# EAGLE board aaduino-v4 (EAGLE 7.6.0)
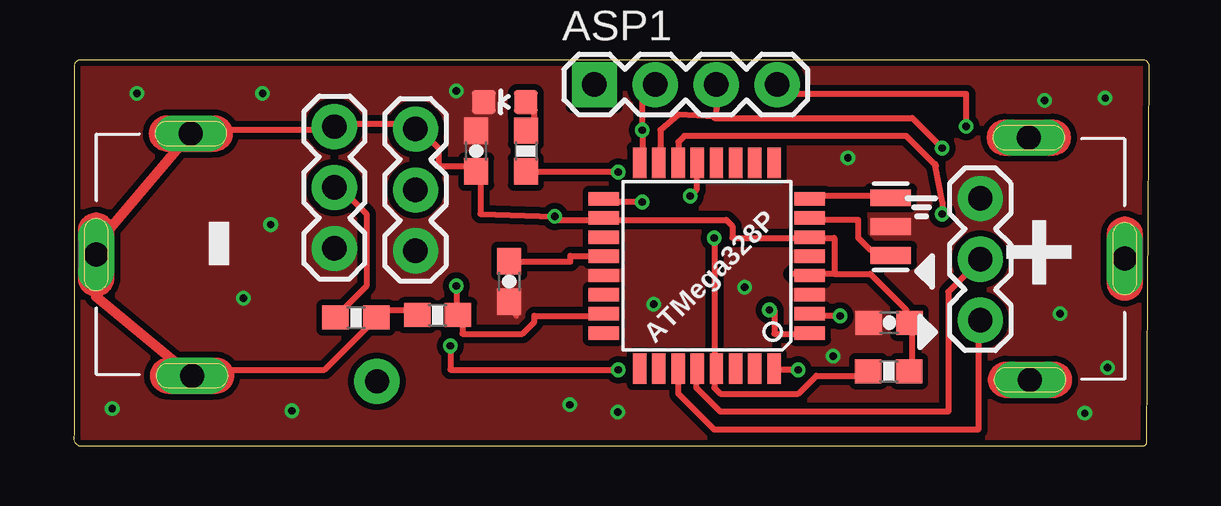
[diagram p0: board, top side]
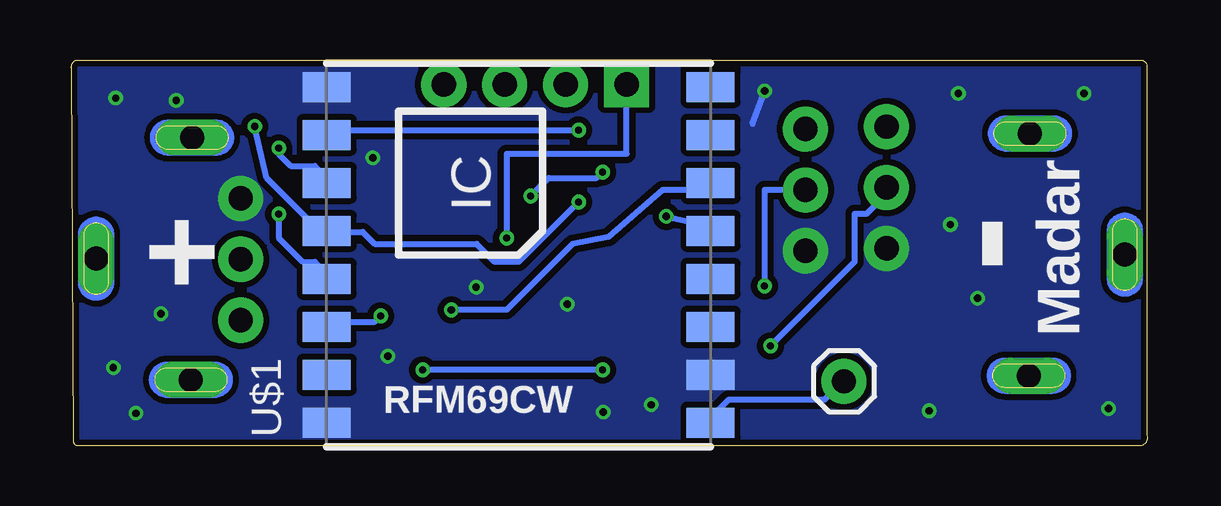
[diagram p1: board, bottom side, seen from below]

Size 44.84 x 16.1 mm. Coordinates in mm from the lower left corner, seen from the top.
Outline: 0.01,15.86 0.01,0.44 arc90 0.25,0.01 44.51,0.01 arc90 44.74,0.14 44.84,15.76 arc90 44.61,16.1 0.35,16.1 arc90 0.01,15.86
Copper layers (1*16): Top 0.035mm / dielectric 1.5mm / Bottom 0.035mm
Design rules "dirt_cheap_dirty_boards.v1 *": minimum track width 10mil, minimum drill 12mil, track to track 10mil, track to pad 10mil, pad to pad 12mil, via to via 12mil, smd to smd 0mil, copper to edge 10mil, drill to drill 12mil, minimum pad ring 10mil, minimum via ring 6mil, stop-mask expansion 2mil, vias tented up to drill 25mil, thermal gap 10mil

## Footprints (pad centres in the part's own frame; a part is rotated, then mirrored left to right if it is on the bottom)
1X01 = drill 1 pad 1.88: 1 0,0
1X04 = drill 1.016 pad 1.88 square: 1 0,0 | drill 1.016 pad 1.88: 2 2.54,0; 3 5.08,0; 4 7.62,0
0603-CAP = smd 1.1 x 1: 1 -0.85,0; 2 0.85,0
KEYSTONE_AA_AAA_BATTERY_TERMINAL-629 = drill 1 pad 1.5 long: GND@1 5,-0.5; GND@2 -0.05,3.45; GND@3 -5.1,-0.55
KEYSTONE_AA_AAA_BATTERY_TERMINAL-637 = drill 1 pad 1.5 long: VCC@1 5,-1.1; VCC@2 -0.05,2.85; VCC@3 -5.1,-1.15
1X03 = drill 1.016 pad 1.88: 1 0,0; 2 2.54,0; 3 5.08,0
LED-0603 = smd 1 x 1: A 0,-0.877; C 0,0.877
0603-RES = smd 1.1 x 1: 1 -0.85,0; 2 0.85,0
TQFP32-08 = smd 1.27 x 0.559: 1 -4.293,2.8; 2 -4.293,2; 3 -4.293,1.2; 4 -4.293,0.4; 5 -4.293,-0.4; 6 -4.293,-1.2; 7 -4.293,-2; 8 -4.293,-2.8; 17 4.293,-2.8; 18 4.293,-2; 19 4.293,-1.2; 20 4.293,-0.4; 21 4.293,0.4; 22 4.293,1.2; 23 4.293,2; 24 4.293,2.8 | smd 0.559 x 1.27: 9 -2.8,-4.293; 10 -2,-4.293; 11 -1.2,-4.293; 12 -0.4,-4.293; 13 0.4,-4.293; 14 1.2,-4.293; 15 2,-4.293; 16 2.8,-4.293; 25 2.8,4.293; 26 2,4.293; 27 1.2,4.293; 28 0.4,4.293; 29 -0.4,4.293; 30 -1.2,4.293; 31 -2,4.293; 32 -2.8,4.293
RESONATOR_SMD = smd 0.7 x 1.7: 1 0.4,0.8; 2 1.6,0.8; 3 2.8,0.8
HOPE-RF-16 = smd 1.25 x 2: 3.3V 1,-8; ANT -7,-8; DIO0 3,-8; DIO1 5,-8; DIO2 7,-8; DIO3 -3,-8; DIO4 -1,-8; DIO5 -5,8; GND1 7,8; GND2 -7,8; GND3 -5,-8; MISO 5,8; MOSI 3,8; NSS -1,8; RESET -3,8; SCK 1,8

## Placement (x,y rotation side)
ANT  M01PTH  [1X01]  12.64,2.7 0 bottom
ASP1  [1X04]  21.7,15.08 0 top
C1  0.1uF  [0603-CAP]  16.78,12.3 90 top
C2  0.1uF  [0603-CAP]  33.99,5.14 180 top
C3  0.1uF  [0603-CAP]  18.15,6.86 270 top
J1  KEYSTONE-629  [KEYSTONE_AA_AAA_BATTERY_TERMINAL-629]  40.36,7.77 270 top
J2  KEYSTONE-637  [KEYSTONE_AA_AAA_BATTERY_TERMINAL-637]  3.79,8.04 90 top
JP1  [1X03]  37.79,10.33 270 top
JP2  [1X03]  10.87,8.24 90 top
JP3  [1X03]  14.25,8.14 90 top
LED1  green  [LED-0603]  17.97,14.35 90 top
R1  10k  [0603-RES]  33.97,3.12 180 top
R2  1k8  [0603-RES]  18.85,12.3 270 top
R3  4k7  [0603-RES]  11.77,5.36 180 top
R4  4k7  [0603-RES]  15.17,5.46 0 top
U1  ATMEGA328P  [TQFP32-08]  26.4,7.52 180 top
U3  RESONATOR_16MHZ  [RESONATOR_SMD]  34.86,7.55 90 top
U$1  RFM69HCW-S2  [HOPE-RF-16]  26.2,7.98 90 bottom

## Library data of the parts
ANT JP1-JP3 = SparkFun-Connectors
ASP1 = SparkFun-Connectors; PROD_ID: CONN-09696
C1-C3 = SparkFun-Capacitors; PROD_ID: CAP-00810
J1 J2 U3 = kanflo
LED1 = SparkFun-LED
R1-R4 = SparkFun-Passives
U1 = SparkFun-DigitalIC; PROD_ID: IC-09069
U$1 = icmi-custom-parts

## Nets
ACT: R2.2 U1.13
ADC0: JP3.2 R4.2 U1.23
GND: C1.2 C2.2 C3.2 J1.GND@1 J1.GND@2 J1.GND@3 JP1.1 JP2.1 JP3.1 LED1.C U1.3 U1.5 U1.21 U3.2 U$1.GND1 U$1.GND2 U$1.GND3
MISO: ASP1.2 U1.16 U$1.MISO
MOSI: ASP1.3 U1.15 U$1.MOSI
N$1: LED1.A R2.1
N$3: ANT.1 U$1.ANT
N$4: C3.1 U1.20
N$5: U1.7 U3.1
N$6: U1.8 U3.3
RESET: ASP1.1 R1.2 U1.29
RFM_IRQ: U1.1 U$1.DIO0
RFM_RST: U1.2 U$1.RESET
SCK: ASP1.4 U1.17 U$1.SCK
SDA: JP1.3 U1.27
SDL: JP1.2 U1.28
SEL: U1.14 U$1.NSS
VCC: C1.1 C2.1 J2.VCC@1 J2.VCC@2 J2.VCC@3 JP2.3 JP3.3 R1.1 R3.1 R4.1 U1.4 U1.6 U1.18 U$1.3.3V
WIRED: JP2.2 R3.2 U1.32

## Tracks (layer width: path | path; a pad name or v marks a point on that pad's centre or on a via)
ACT  (via drill 0.3)
  Top 0.254: v22.7,11.43 18.95,11.43 R2.2 | v25.7,10.43 25.95,10.68 25.95,11.68 U1.13
  Bottom 0.254: v22.7,11.43 22.95,11.18 24.95,11.18 v25.7,10.43
ADC0  (via drill 0.3)
  Top 0.254: v15.95,6.68 15.95,5.68 R4.2 16.2,5.43 16.2,4.68 18.7,4.68 19.2,5.18 19.2,5.43 21.95,5.43 U1.23
  Bottom 0.254: v15.95,6.68 15.95,10.68 14.45,10.68 JP3.2
GND  (via drill 0.3 pad 0.25)
  Top 0.254: 34.2,9.18 U3.2 | 32.7,5.43 C2.2 | 18.45,5.43 C3.2 | 30.7,7.93 U1.5
  Bottom 0.254: 16.45,13.43 v15.95,14.81
  other vias: 2.63,14.71 7.88,14.71 1.61,1.57 7.08,6.17 9.1,1.47 20.68,1.72 41.12,5.52 8.21,9.24 42.15,1.37 43.1,3.27 40.48,14.41 43,14.51 22.68,1.42 31.66,3.75 32.28,12.02 24.18,5.92 27.98,6.62
  pour Bottom (rank 6, no thermals): 0.01,16.2 44.94,16.2 44.64,0.01 0.01,0.01
  pour Top (rank 6, no thermals): 0.01,16.2 44.94,16.2 44.64,-0.39 0.01,0.01
MISO  (via drill 0.3)
  Top 0.254: U1.16 23.7,12.18 v23.7,13.18 23.7,14.43 24.2,14.93 ASP1.2
  Bottom 0.254: v23.7,13.18 34.2,13.18 U$1.MISO
MOSI  (via drill 0.3)
  Top 0.254: 26.71,13.73 26.75,13.73 26.95,14.93 ASP1.3 | 26.71,13.73 25.2,13.83 24.45,13.18 24.45,12.43 U1.15 | v36.2,12.43 34.95,13.68 26.7,13.68 26.71,13.73
  Bottom 0.254: U$1.MOSI 34.2,11.18 34.7,11.68 35.7,11.68 36.2,12.18 v36.2,12.43
N$1
  Top 0.254: LED1.A 19.2,14.18 19.2,13.18 R2.1
N$3
  Bottom 0.254: U$1.ANT 18.2,1.18 17.45,1.93 13.45,1.93 12.7,2.68 ANT.1
N$4
  Top 0.254: C3.1 18.2,7.68 20.7,7.68 20.7,7.93 21.95,7.93 U1.20
N$5
  Top 0.254: U1.7 30.7,9.43 32.7,9.43 32.7,8.68 33.2,8.18 33.95,8.18 U3.1
N$6
  Top 0.254: U1.8 30.7,10.43 33.95,10.43 U3.3
RESET  (via drill 0.3)
  Top 0.254: v26.7,8.68 26.7,3.68 U1.29 26.7,3.18 26.7,2.43 26.95,2.18 30.2,2.18 30.95,2.93 32.95,2.93 R1.2
  Bottom 0.254: v26.7,8.68 26.7,12.18 21.7,12.18 ASP1.1 21.7,15.18
RFM_IRQ  (via drill 0.3)
  Top 0.254: U1.1 30.45,4.68 29.2,4.68 29.2,5.68 v29,5.68
  Bottom 0.254: U$1.DIO0 18.2,10.68 20.2,10.68 22.45,8.73 23.95,8.43 26.7,5.68 v29,5.68 29.2,5.68
RFM_RST  (via drill 0.3)
  Top 0.254: v31.95,5.43 30.7,5.43 U1.2
  Bottom 0.254: v31.95,5.43 32.2,5.18 34.2,5.18 U$1.RESET
SCK  (via drill 0.3)
  Top 0.254: 29.45,14.93 ASP1.4 29.7,14.68 37.2,14.68 v37.2,13.33 37.2,13.18 | v23.7,10.18 22.2,10.18 U1.17
  Bottom 0.254: 34.2,8.68 34.2,8.93 | v37.2,13.33 36.7,11.18 34.7,9.18 34.2,9.18 U$1.SCK 34.2,8.93 | v23.7,10.18 26.2,7.68 27.2,7.68 27.95,8.43 32.2,8.43 32.7,8.93 34.2,8.93
SDA
  Top 0.254: U1.27 25.2,3.18 25.2,2.18 26.7,0.68 37.7,0.68 37.7,5.18 JP1.3
SDL
  Top 0.254: U1.28 25.95,3.18 25.95,2.43 26.95,1.43 36.45,1.43 36.45,6.43 37.7,7.68 JP1.2
SEL  (via drill 0.3)
  Top 0.254: U1.14 25.2,12.68 25.45,12.93 34.7,12.93 35.95,11.68 35.92,11.67 | 35.92,11.67 36.2,10.18 v36.2,9.68 | 35.92,11.67 35.9,11.78
  Bottom 0.254: v36.2,9.68 36.2,8.68 35.2,7.68 34.7,7.68 34.2,7.18 U$1.NSS
VCC  (via drill 0.3)
  Top 0.254: J2.VCC@3 4.95,3.18 10.45,3.18 12.45,5.18 R3.1 12.7,5.68 14.2,5.68 R4.1 | JP3.3 14.2,13.43 10.95,13.43 JP2.3 10.7,13.18 5.2,13.18 J2.VCC@1 | 34.45,3.43 R1.1 34.95,3.43 34.95,5.18 C2.1 | 34.45,5.18 C2.1 | 14.45,13.43 JP3.3 | 34.7,5.43 C2.1 | 29.95,7.18 30.45,7.18 U1.4 30.7,7.18 31.7,7.18 | 31.7,7.18 31.7,8.68 30.7,8.68 U1.6 30.45,8.68 27.45,8.68 27.45,9.18 27.2,9.43 22.2,9.43 U1.18 21.95,9.43 19.95,9.43 v20.05,9.58 16.95,9.68 16.95,11.43 C1.1 16.7,11.68 15.2,11.68 15.2,12.43 14.45,13.18 JP3.3 | 31.7,7.18 33.2,7.18 34.7,5.68 C2.1
  Top 0.406: J2.VCC@1 0.94,8.39 J2.VCC@2 0.94,6.24 J2.VCC@3
  Bottom 0.254: 18.2,8.93 U$1.3.3V 18.2,9.18 v20.05,9.58
WIRED  (via drill 0.3)
  Top 0.254: 10.7,5.18 R3.2 11.2,5.68 12.2,6.68 12.2,9.68 11.2,10.68 JP2.2 | v30.2,3.18 29.2,3.18 U1.32 | v22.7,3.18 15.7,3.18 v15.7,4.18
  Bottom 0.254: v22.7,3.18 v30.2,3.18 | v15.7,4.18 12.2,7.68 12.2,9.68 11.7,9.68 10.7,10.68 JP2.2

## Text on the board
tNames: - | + | ATMega328P
bNames: Madar | - | + | RFM69CW